# Altium PCB Diff_Amp_PCB.PcbDoc
Units mm, origin at the board's own origin, x right, y up, seen from the top; angles counter-clockwise.
Board outline 44.07 x 45.34 mm, 2 copper layers (Top Layer, Bottom Layer); 12 components, 15 nets, 46 pads, 3 vias.
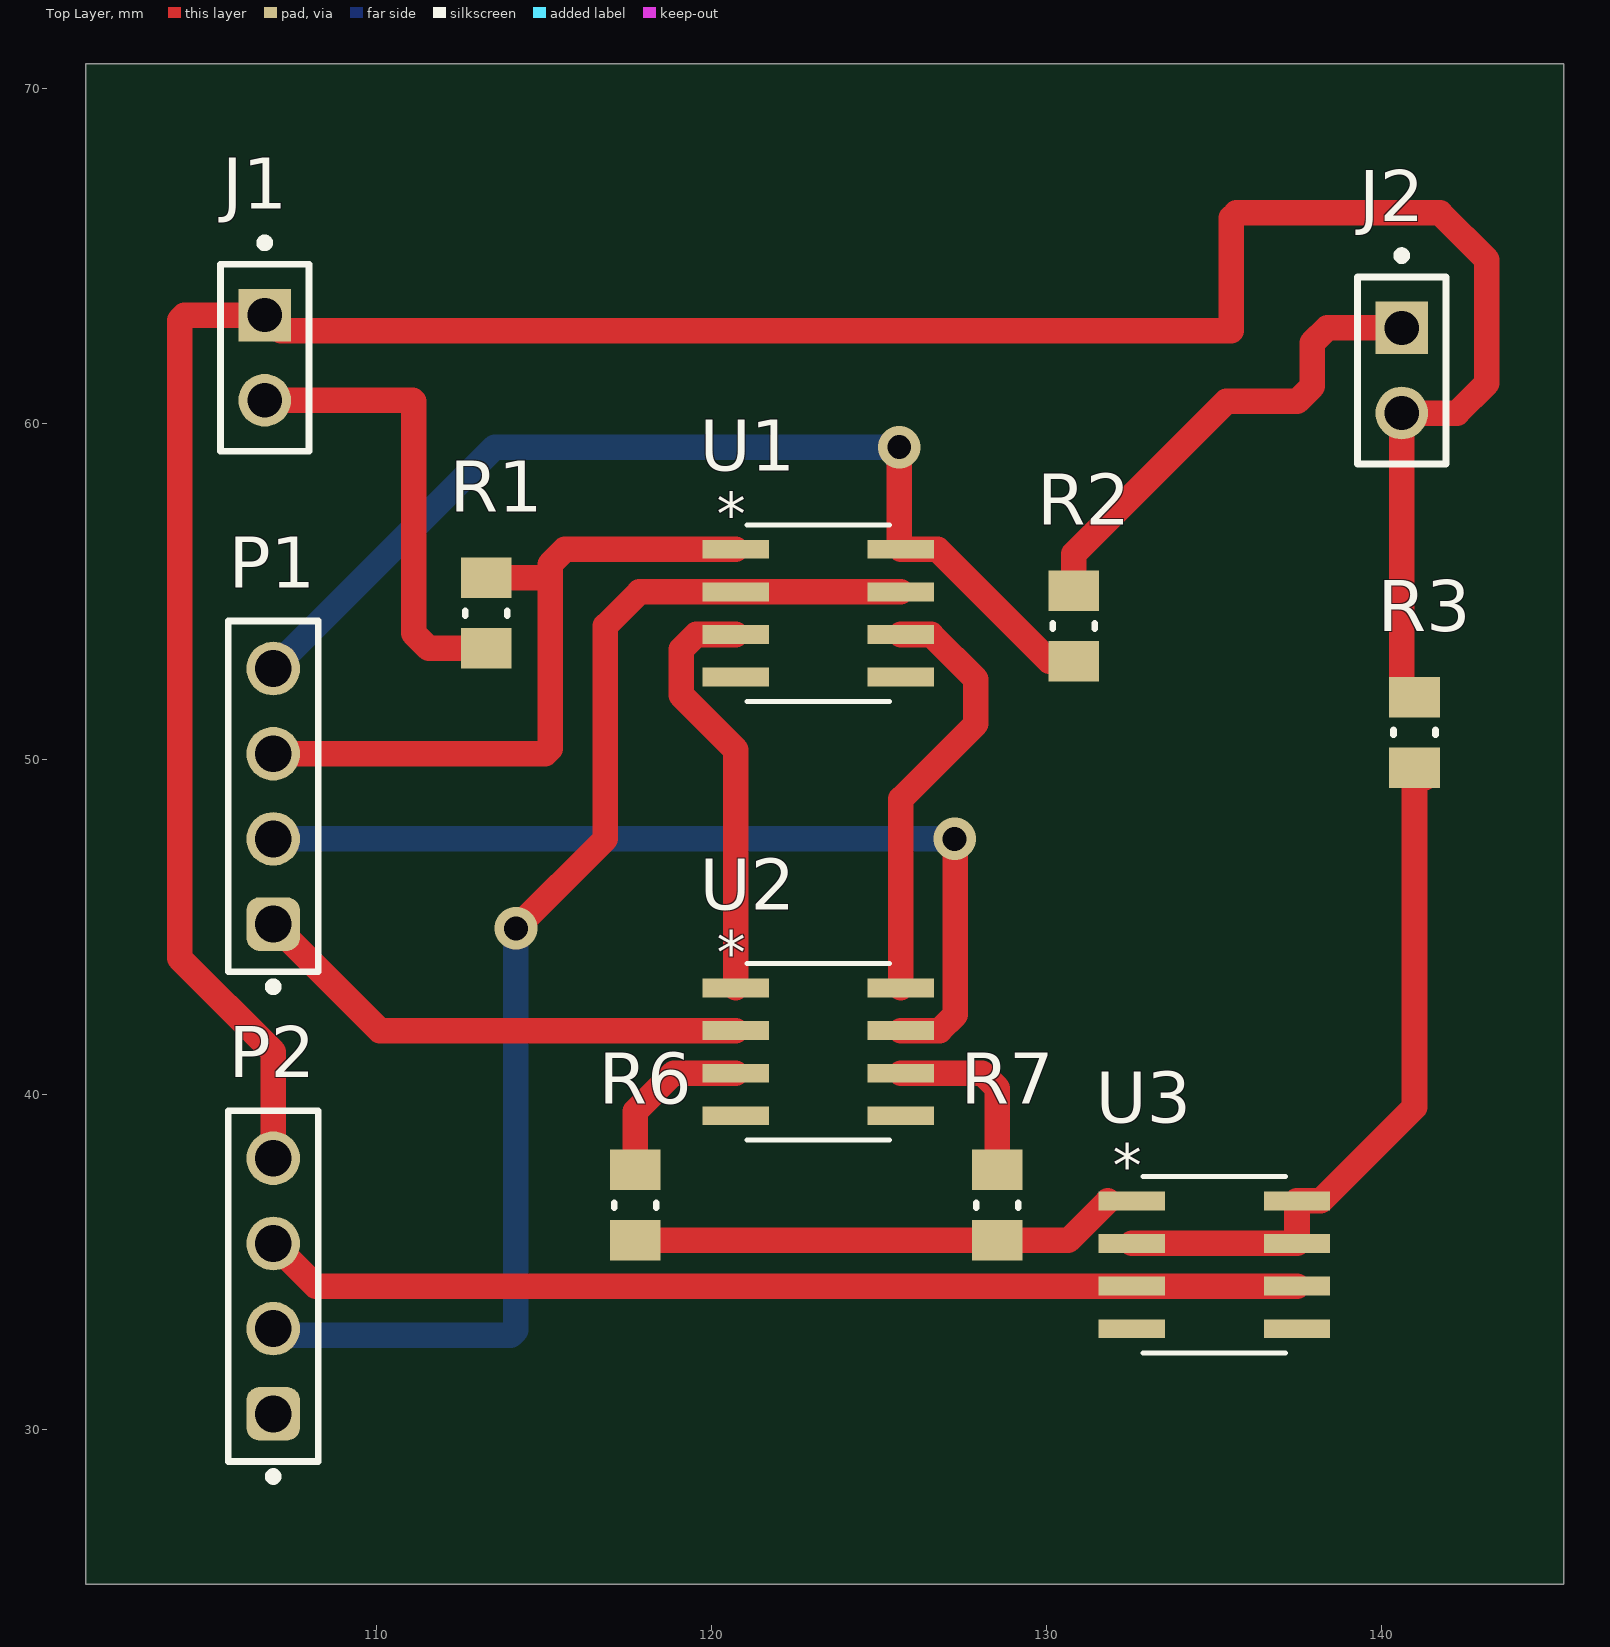
[diagram p0: Top Layer view]
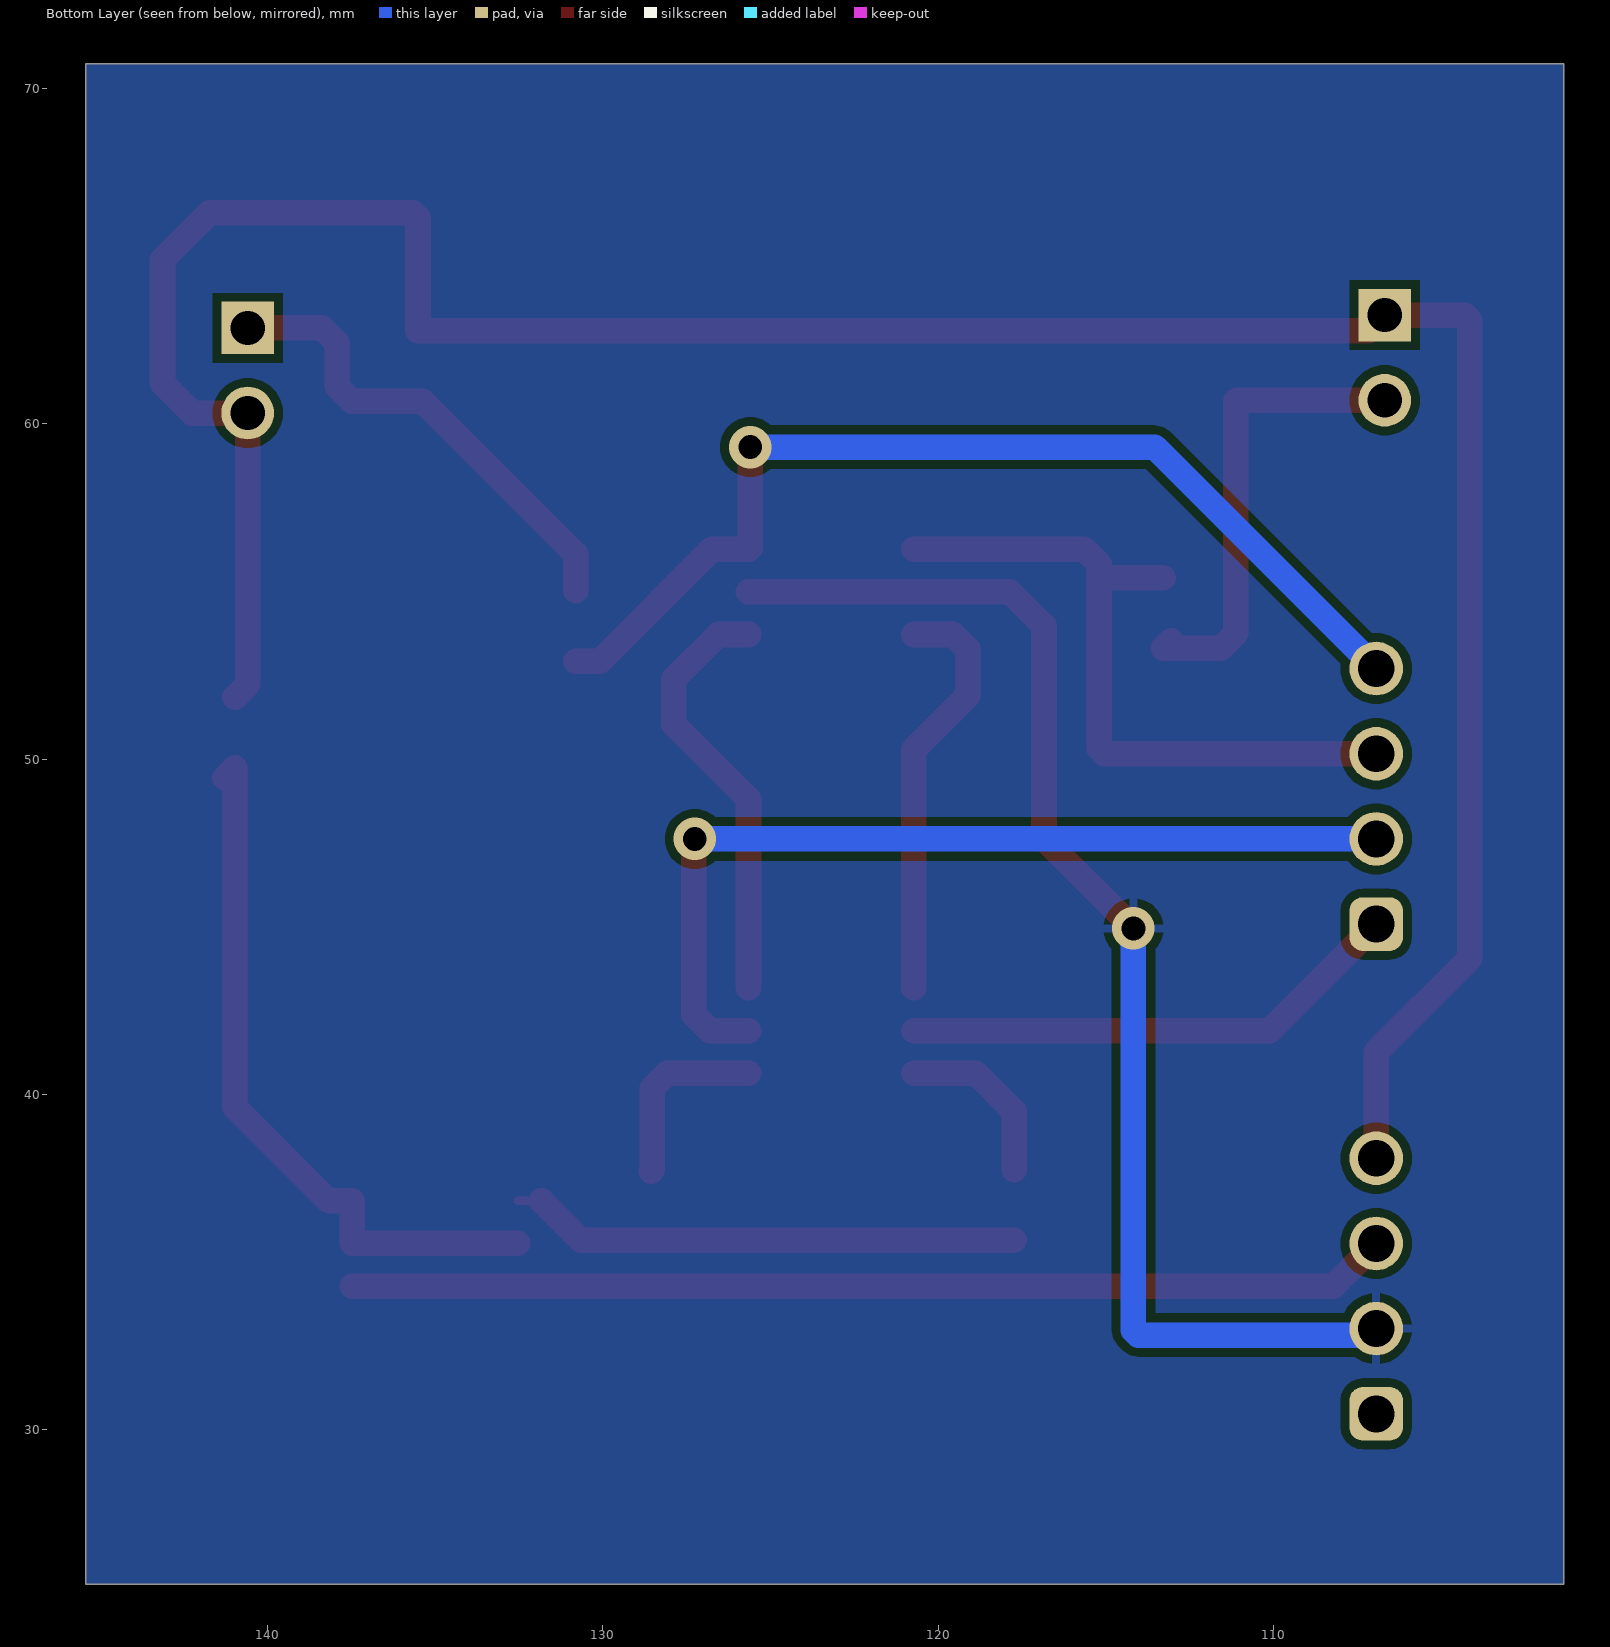
[diagram p1: Bottom Layer view, seen from below]
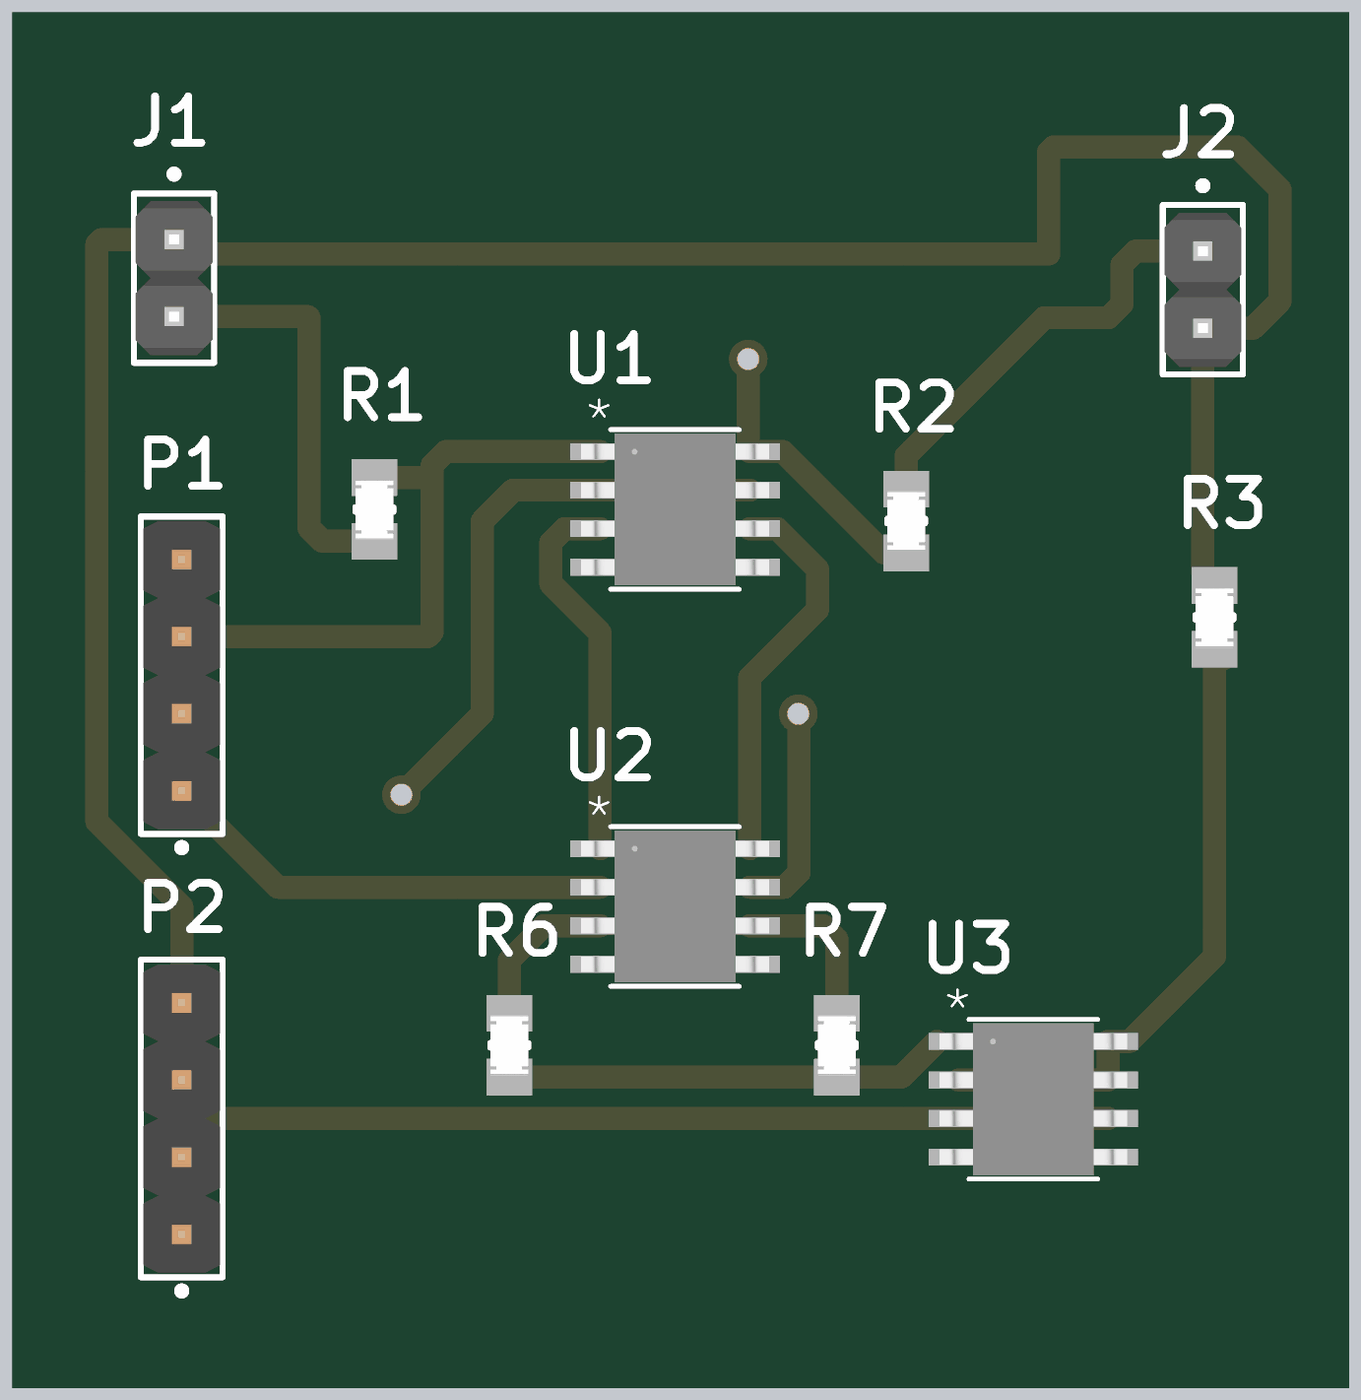
[diagram p2: 3D render of the assembled board from above, using the file's embedded part models]

## Layer stack, top to bottom
Top Solder: solder mask 0.0102, Solder Resist, Dk 3.5
Top Layer: signal copper 0.0356
Dielectric 1: dielectric 0.32, FR-4, Dk 4.8
Bottom Layer: signal copper 0.0356
Bottom Solder: solder mask 0.0102, Solder Resist, Dk 3.5

## Board outline
101.346,25.4 145.415,25.4 145.415,70.739 101.346,70.739

## Design rules (kind name [scope] priority, off if disabled: settings)
Clearance [All] p1: gap=0.254 ignorepadtopadclearanceinfootprint=FALSE ismatrix=TRUE
PolygonConnect [All] p1: connectstyle=Relief reliefconductorwidth=0.254 reliefentries=4 polygonreliefangle="90 Angle" airgapwidth=0.254
RoutingVias [All] p1: holewidth=0.711 width=1.27 viastyle="Through Hole" minholewidth=0.711 minwidth=1.27 maxholewidth=0.711 maxwidth=1.27
SolderMaskExpansion [All] p1: expansion=0.102 istentingtop=FALSE
Width [All] p1: maxlimit=0.254 minlimit=0.254 preferedwidth=0.254
30 further rules are at their usual default settings.

## Components (designator, comment, footprint, x,y, rotation, side; value= is the part's Value field where it differs from the comment)
J1 "M20-9990246" FP-M20-9990246-MFG 106.68,61.976 r270 top
J2 "M20-9990246" FP-M20-9990246-MFG 140.589,61.595 r270 top
P1 "61300411121" 61300411121 106.934,48.895 r90 top
P2 "61300411121" 61300411121 106.934,34.29 r90 top
R1 "CRCW08052K70FKEA" FP-CRCW0805-e3-IPC_A 113.284,54.356 r90 top value=2.7k
R2 "CRCW08052K70FKEA" FP-CRCW0805-e3-IPC_A 130.81,53.975 r270 top value=2.7k
R3 "CRCW08052K70FKEA" FP-CRCW0805-e3-IPC_A 140.97,50.8 r270 top value=5.6k
R6 "CRCW08052K70FKEA" FP-CRCW0805-e3-IPC_A 117.729,36.703 r270 top value=2.7k
R7 "CRCW08052K70FKEA" FP-CRCW0805-e3-IPC_A 128.524,36.703 r270 top value=2.7k
U1 "SSM2212RZ" R_8_ADI 123.19,54.356 r0 top
U2 "SSM2212RZ" R_8_ADI 123.19,41.275 r0 top
U3 "SSM2212RZ" R_8_ADI 135.001,34.925 r0 top

## Footprints (in the part's own frame and the unit in brackets; to place one, negate y for a bottom-side part, rotate by r counter-clockwise, add the part's x,y. Pads: shape width x height; smd on the part's side, far side on the other; paste and mask are expansions set on the pad)
61300411121 [mm] "Pin Header, pitch 2.54 mm, THT, Vertical, single row, 4p"
  rrect50% 1.6x1.6 hole 1.1: 1(-3.81,0)
  round 1.6 hole 1.1: 2(-1.27,0) 3(1.27,0) 4(3.81,0)
  silkscreen extent -5.8,-1.35 5.23,1.35, body extent -5.08,-1.27 5.08,1.27, height 8.57
FP-CRCW0805-e3-IPC_A [mil]
  rect 47.5x59.38 smd paste+0 mask+0: 1(-41.37,0) 2(41.37,0)
  silkscreen extent -3,-25 3,25, body extent -85,-49 85,49, height 10
FP-M20-9990246-MFG [mm]
  rect 1.57x1.57 hole 1.02 paste-2539.97 mask+0: 1(-1.27,0)
  round 1.57 hole 1.02 paste-2539.97 mask+0: 2(1.27,0)
  silkscreen extent -3.55,-1.32 2.79,1.32, body extent -2.89,-1.42 2.89,1.42, height 0.25
R_8_ADI [mil]
  rect 78x22 smd paste+0 mask+0: 1(-97,75) 2(-97,25) 3(-97,-25) 4(-97,-75) 5(97,-75) 6(97,-25) 7(97,25) 8(97,75)
  silkscreen extent -84,-104 84,104, body extent -122,-99 122,99, height 69

## Part data
J1 J2: library part CMP-002-00800-1, "Board Connector, 2 Contact(s), 1 Row(s), Male, Straight, 0.1 inch Pitch, Solder Terminal, Locking, Black Insulator", Max Operating Temperature=105°C, Min Operating Temperature=-40°C, Connector Type="BOARD CONNECTOR", Mounting Technology=Board, RoHS Compliant=Yes
P1 P2: library part CMP-002-00806-1, "Board Connector, 4 Contact(s), 1 Row(s), Male, Straight, 0.1 inch Pitch, Solder Terminal, Locking, Black Insulator, Plug", Max Operating Temperature=125°C, Min Operating Temperature=-40°C, Connector Type="BOARD CONNECTOR", Mounting Technology=Board, RoHS Compliant=Yes
R1 R2 R3 R6 R7: library part CMP-009-00327-1, "Fixed Resistor, Metal Glaze/thick Film, 0.125W, 2700ohm, 150V, 1% +/-Tol, 100ppm/Cel, Surface Mount, 0805", Case/Package=0805, Max Operating Temperature=155°C, Min Operating Temperature=-55°C, Power=125mW, Tolerance=1%, Mounting Technology="Surface Mount", Pins=2, RoHS Compliant=Yes
U1 U2 U3: library part CMP-034-000000-1, "No Description Available", Mfr_Name="Analog Devices Inc", Design Item ID=SSM2212RZ, RefDes=RefDes, Source=SSM2212RZ.SchLib, Type=Type

## Via types
v1: diameter 1.27, hole 0.711, Top Layer to Bottom Layer, tented both sides, 3 vias

## Nets (pads, with @x,y where several pads share a name; then routed paths per layer and width w, separated by ;. In a path a pad name is that pad's centre, name@x,y a point inside that pad or via, vN(x,y) a via of type N, cw(c..) or ccw(c..) an arc to the next point about the centre after c; other vN are vias at no path point)
GND: P2.2 U1.2 U1.7 | length 38.7
  Top Layer w0.762: v1(114.173,44.958) 116.84,47.625 116.84,53.975 117.856,54.991 U1.2 U1.7
  Bottom Layer w0.762: P2.2 107.129,32.825 114.024,32.825 114.173,32.974 v1(114.173,44.958)
NetJ1_1: J1.1 J2.2 P2.4 R3.1 | length 84.6
  Top Layer w0.762: P2.4 106.934,41.275 104.14,44.069 104.14,63.097 104.289,63.246 J1.1 107.153,62.773 111.125,62.773 135.509,62.773 135.509,66.145 135.658,66.294 141.732,66.294 143.129,64.897 143.129,61.214 142.24,60.325 J2.2 140.589,52.232 R3.1
NetJ1_2: J1.2 R1.1 | length 14
  Top Layer w0.762: J1.2 111.09,60.706 111.125,60.671 111.125,53.752 111.571,53.305 R1.1 R1.1@113.062,53.527
NetJ2_1: J2.1 R2.1 | length 14.4
  Top Layer w0.762: R2.1 130.81,56.123 135.358,60.671 135.509,60.671 137.476,60.671 137.922,61.118 137.922,62.419 138.368,62.865 J2.1
NetP1_1: P1.1 U2.2 | length 15.1
  Top Layer w0.762: P1.1 110.109,41.91 U2.2
NetP1_2: P1.2 U2.7 | length 27.4
  Top Layer w0.762: U2.7 126.808,41.91 127.279,42.382 127.279,47.6 v1(127.254,47.625)
  Bottom Layer w0.762: P1.2 v1(127.254,47.625)
NetP1_3: P1.3 R1.2 U1.1 | length 21.5
  Top Layer w0.762: P1.3 115.04,50.165 115.189,50.314 115.189,55.372 ; R1.2 115.154,55.407 115.189,55.372 ; U1.1 115.635,56.261 115.189,55.815 115.189,55.372
NetP1_4: P1.4 R2.2 U1.8 | length 31
  Top Layer w0.762: v1(125.603,59.309) 125.603,56.312 U1.8 126.746,56.261 130.083,52.924 R2.2
  Bottom Layer w0.762: P1.4 113.538,59.309 v1(125.603,59.309)
NetP2_3: P2.3 U3.3 U3.6 | length 31.1
  Top Layer w0.762: P2.3 108.204,34.29 U3.3 U3.6
NetR3_2: R3.2 U3.2 U3.7 U3.8 | length 21.4
  Top Layer w0.762: U3.2 U3.7 U3.8 138.176,36.83 140.97,39.624 R3.2 R3.2@141.275,49.444
NetR6_1: R6.1 U2.3 | length 5.2
  Top Layer w0.762: R6.1 117.729,39.497 118.872,40.64 U2.3
NetR6_2: R6.2 R7.2 U3.1 | length 15.3
  Top Layer w0.254: U3.1@131.826,36.83 U3.1
  Top Layer w0.762: R6.2 R7.2 130.648,35.652 U3.1@131.826,36.83
NetR7_1: R7.1 U2.6 | length 5.5
  Top Layer w0.762: U2.6 128.078,40.64 128.524,40.194 R7.1 R7.1@128.559,37.719
NetU1_3: U1.3 U2.1 | length 12.6
  Top Layer w0.762: U2.1 120.726,50.283 119.101,51.909 119.101,53.275 119.547,53.721 U1.3
NetU1_6: U1.6 U2.8 | length 12.9
  Top Layer w0.762: U2.8 125.654,48.819 127.889,51.054 127.889,52.384 126.552,53.721 U1.6
pads on no net: P2.1 U1.4 U1.5 U2.4 U2.5 U3.4 U3.5

## Polygon pours and split planes (outlines as drawn)
GND on Bottom Layer "Bottom Ground" (solid, pour order 1): 101.346,70.739 145.415,70.739 145.415,25.4 101.346,25.4

## Text inside footprints (layer, text, board x,y; h text height)
U1: Top 3D Body "*" at 121.26,55.512 h1.27; Top Overlay "*" at 120.155,56.693 h1.27
U2: Top 3D Body "*" at 121.26,42.431 h1.27; Top Overlay "*" at 120.155,43.612 h1.27
U3: Top 3D Body "*" at 133.071,36.081 h1.27; Top Overlay "*" at 131.966,37.262 h1.27